# EAGLE board 00_CoverStage_Alt_v1 (EAGLE 9.6.2), part 1 of 5
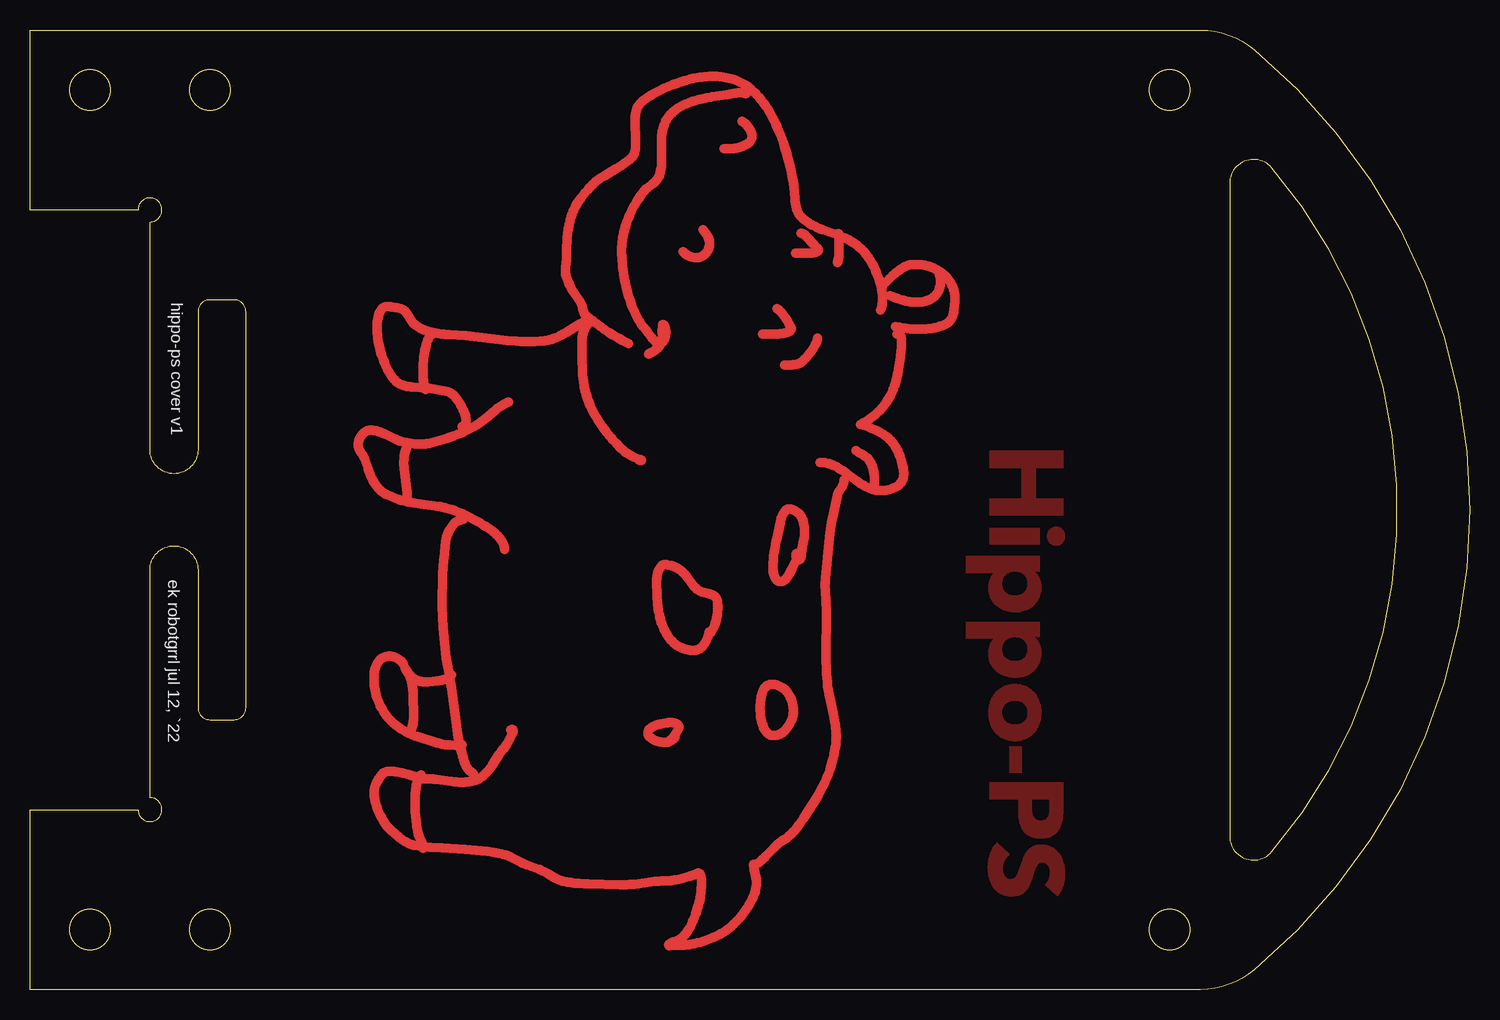
[diagram p0: board, top side]
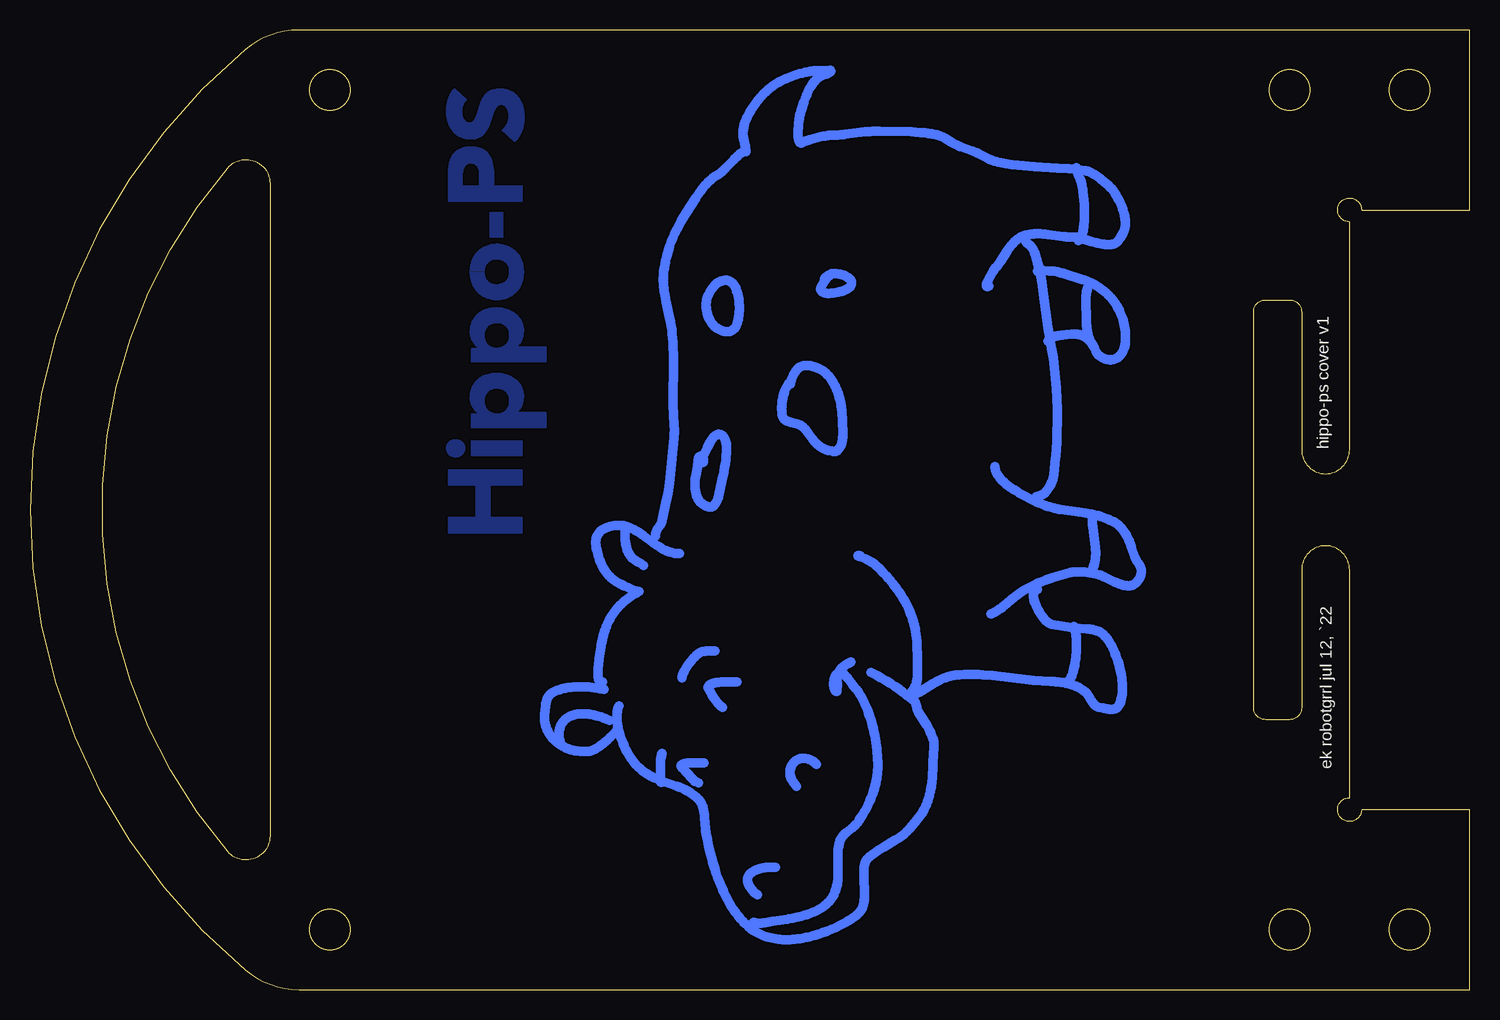
[diagram p1: board, bottom side, seen from below]

Size 120 x 80 mm. Coordinates in mm from the lower left corner, seen from the top.
Outline: 97.57,80 arc-40 102.06,78.37 arc-100 102.06,1.63 arc-40 97.57,0 0,0 0,15 9,15 arc270 10,16 10,35 arc-180 14,35 14,23.5 arc90 15,22.5 17,22.5 arc90 18,23.5 18,56.5 arc90 17,57.5 15,57.5 arc90 14,56.5 14,45 arc-180 10,45 10,64 arc270 9,65 0,65 0,80 97.57,80
Outline: 100,67.2 100,12.8 arc140 103.52,11.5 arc81 103.52,68.5 arc140 100,67.2
Outline: circle at 15,5 radius 1.7
Outline: circle at 15,75 radius 1.7
Outline: circle at 5,5 radius 1.7
Outline: circle at 5,75 radius 1.7
Outline: circle at 95,75 radius 1.7
Outline: circle at 95,5 radius 1.7
Copper layers (1*16): Top 0.035mm / dielectric 1.5mm / Bottom 0.035mm
Design rules "default *": minimum track width 8mil, minimum drill 0.35mm, track to track 10mil, track to pad 10mil, pad to pad 10mil, via to via 10mil, smd to smd 10mil, copper to edge 40mil, drill to drill 10mil, minimum pad ring 10mil, minimum via ring 8mil, stop-mask expansion 4mil, vias tented up to drill 0mil, thermal gap 10mil

## Placement (x,y rotation side)

## Tracks (layer width: path | path; a pad name or v marks a point on that pad's centre or on a via)
N$1
  Top 0.8: 68.94,42.39 67.98,43.1
N$2
  pour Top: 86.13,44.89 80.03,44.89 79.99,44.85 79.99,43.57 80.03,43.53 82.59,43.53 82.64,43.51 82.64,40.95 82.62,40.9 80.05,40.9 79.99,40.89 79.99,39.61 80,39.55 86.11,39.55 86.13,39.6 86.13,40.88 86.08,40.9 83.9,40.9 83.84,40.92 83.84,43.48 83.87,43.53 86.13,43.53 86.13,43.6
N$3
  pour Top: 85.52,38.55 85.45,38.55 85.37,38.53 85.3,38.51 85.23,38.49 85.16,38.45 85.1,38.41 85.04,38.37 84.99,38.31 84.94,38.26 84.89,38.2 84.86,38.13 84.83,38.06 84.8,37.99 84.79,37.92 84.78,37.84 84.78,37.77 84.79,37.69 84.8,37.62 84.82,37.55 84.85,37.48 84.88,37.41 84.93,37.35 84.97,37.29 85.03,37.24 85.08,37.19 85.15,37.15 85.21,37.11 85.28,37.08 85.35,37.06 85.43,37.05 85.5,37.04 85.58,37.04 85.65,37.05 85.73,37.06 85.8,37.09 85.87,37.12 85.93,37.15 85.99,37.2 86.05,37.25 86.1,37.3 86.15,37.36 86.19,37.42 86.23,37.49 86.25,37.56 86.27,37.63 86.28,37.7 86.29,37.78 86.29,37.85 86.28,37.93 86.26,38 86.24,38.07 86.21,38.14 86.17,38.21 86.12,38.27 86.07,38.32 86.02,38.37 85.96,38.42 85.9,38.46 85.83,38.49 85.76,38.52 85.68,38.54 85.61,38.55 85.53,38.55
N$4
  pour Top: 84.21,37.14 84.21,38.42 84.15,38.45 80.02,38.45 79.99,38.4 79.99,37.2 80.01,37.14
N$5
  pour Top: 216 corners
N$6
  pour Top: 216 corners
N$7
  pour Top: 228 corners
N$8
  pour Top: 81.63,20.22 81.63,18.1 81.69,18.08 82.67,18.08 82.67,20.2 82.61,20.22
N$9
  pour Top: 86.13,17.24 80.04,17.24 79.99,17.22 79.99,15.94 80.01,15.89 82.34,15.89 82.37,15.86 83.54,15.89 84.92,15.89 84.99,15.88 84.99,15.13 84.98,14.98 84.97,14.91 84.96,14.76 84.95,14.68 84.93,14.61 84.91,14.54 84.89,14.47 84.86,14.4 84.82,14.33 84.78,14.27 84.73,14.21 84.67,14.16 84.61,14.12 84.54,14.08 84.47,14.06 84.4,14.04 84.32,14.03 84.25,14.03 84.17,14.04 84.1,14.05 84.03,14.06 83.96,14.09 83.89,14.12 83.83,14.17 83.77,14.22 83.72,14.27 83.68,14.33 83.64,14.4 83.61,14.47 83.59,14.54 83.57,14.61 83.55,14.69 83.54,14.76 83.54,14.84 83.53,14.91 83.53,15.88 82.38,15.84 82.39,14.65 82.41,14.43 82.44,14.2 82.48,13.98 82.5,13.91 82.52,13.84 82.54,13.77 82.56,13.69 82.59,13.62 82.62,13.56 82.66,13.49 82.69,13.42 82.73,13.36 82.77,13.29 82.82,13.23 82.86,13.18 82.91,13.12 82.97,13.07 83.02,13.02 83.08,12.97 83.14,12.93 83.21,12.89 83.27,12.85 83.34,12.81 83.41,12.78 83.48,12.75 83.55,12.73 83.62,12.71 83.69,12.69 83.76,12.67 83.84,12.66 83.91,12.65 83.99,12.64 84.14,12.63 84.29,12.63 84.44,12.63 84.51,12.64 84.59,12.64 84.66,12.65 84.74,12.67 84.88,12.7 84.96,12.72 85.03,12.75 85.1,12.78 85.16,12.81 85.23,12.84 85.29,12.88 85.36,12.92 85.42,12.97 85.48,13.01 85.53,13.06 85.59,13.12 85.64,13.17 85.69,13.23 85.73,13.29 85.77,13.35 85.81,13.42 85.85,13.48 85.88,13.55 85.91,13.62 85.94,13.69 85.97,13.76 85.99,13.83 86.03,13.98 86.05,14.05 86.08,14.27 86.11,14.5 86.13,14.72 86.13,17.2
N$10
  pour Top: 262 corners
N$11
  Top 0.8: 72.16,55.28 72.44,55.22
N$12
  Top 0.8: 72.44,55.22 72.57,55.19
N$13
  Top 0.8: 72.57,55.19 72.78,55.15
N$14
  Top 0.8: 72.78,55.15 72.92,55.13
N$15
  Top 0.8: 72.92,55.13 73.13,55.11
N$16
  Top 0.8: 73.13,55.11 73.2,55.1
N$17
  Top 0.8: 73.2,55.1 73.41,55.08
N$18
  Top 0.8: 73.41,55.08 73.69,55.06
N$19
  Top 0.8: 73.69,55.06 73.97,55.06
N$20
  Top 0.8: 73.97,55.06 74.18,55.05
N$21
  Top 0.8: 74.18,55.05 74.32,55.05
N$22
  Top 0.8: 74.32,55.05 74.53,55.06
N$23
  Top 0.8: 74.53,55.06 74.67,55.07
N$24
  Top 0.8: 74.67,55.07 74.88,55.09
N$25
  Top 0.8: 74.88,55.09 75.02,55.1
N$26
  Top 0.8: 75.02,55.1 75.16,55.12
N$27
  Top 0.8: 75.16,55.12 75.3,55.15
N$28
  Top 0.8: 75.3,55.15 75.44,55.17
N$29
  Top 0.8: 75.44,55.17 75.57,55.2
N$30
  Top 0.8: 75.57,55.2 75.71,55.24
N$31
  Top 0.8: 75.71,55.24 75.78,55.26
N$32
  Top 0.8: 75.78,55.26 75.91,55.3
N$33
  Top 0.8: 75.91,55.3 76.04,55.35
N$34
  Top 0.8: 76.04,55.35 76.11,55.37
N$35
  Top 0.8: 76.11,55.37 76.17,55.4
N$36
  Top 0.8: 76.17,55.4 76.3,55.46
N$37
  Top 0.8: 76.3,55.46 76.36,55.5
N$38
  Top 0.8: 76.36,55.5 76.42,55.53
N$39
  Top 0.8: 76.42,55.53 76.48,55.57
N$40
  Top 0.8: 76.48,55.57 76.53,55.61
N$41
  Top 0.8: 76.53,55.61 76.59,55.66
N$42
  Top 0.8: 76.59,55.66 76.64,55.7
N$43
  Top 0.8: 76.64,55.7 76.69,55.75
N$44
  Top 0.8: 76.69,55.75 76.74,55.8
N$45
  Top 0.8: 76.74,55.8 76.78,55.86
N$46
  Top 0.8: 76.78,55.86 76.82,55.92
N$47
  Top 0.8: 76.82,55.92 76.85,55.98
N$48
  Top 0.8: 76.85,55.98 76.88,56.04
N$49
  Top 0.8: 76.88,56.04 76.91,56.11
N$50
  Top 0.8: 76.91,56.11 76.93,56.17
N$51
  Top 0.8: 76.93,56.17 76.95,56.24
N$52
  Top 0.8: 76.95,56.24 76.99,56.38
N$53
  Top 0.8: 76.99,56.38 77.01,56.52
N$54
  Top 0.8: 77.01,56.52 77.02,56.59
N$55
  Top 0.8: 77.02,56.59 77.07,57.08
N$56
  Top 0.8: 77.07,57.08 77.1,57.35
N$57
  Top 0.8: 77.1,57.35 77.11,57.56
N$58
  Top 0.8: 77.11,57.56 77.11,57.7
N$59
  Top 0.8: 77.11,57.7 77.1,57.78
N$60
  Top 0.8: 77.1,57.78 77.09,57.91
N$61
  Top 0.8: 77.09,57.91 77.07,58.05
N$62
  Top 0.8: 77.07,58.05 77.06,58.12
N$63
  Top 0.8: 77.06,58.12 77.02,58.26
N$64
  Top 0.8: 77.02,58.26 76.98,58.39
N$65
  Top 0.8: 76.98,58.39 76.96,58.46
N$66
  Top 0.8: 76.96,58.46 76.91,58.59
N$67
  Top 0.8: 76.91,58.59 76.85,58.72
N$68
  Top 0.8: 76.85,58.72 76.79,58.84
N$69
  Top 0.8: 76.79,58.84 76.75,58.91
N$70
  Top 0.8: 76.75,58.91 76.68,59.02
N$71
  Top 0.8: 76.68,59.02 76.64,59.08
N$72
  Top 0.8: 76.64,59.08 76.56,59.2
N$73
  Top 0.8: 76.56,59.2 76.47,59.3
N$74
  Top 0.8: 76.47,59.3 76.38,59.41
N$75
  Top 0.8: 76.38,59.41 76.33,59.46
N$76
  Top 0.8: 76.33,59.46 76.23,59.56
N$77
  Top 0.8: 76.23,59.56 76.12,59.65
N$78
  Top 0.8: 76.12,59.65 76.01,59.74
N$79
  Top 0.8: 76.01,59.74 75.96,59.78
N$80
  Top 0.8: 75.96,59.78 75.84,59.86
N$81
  Top 0.8: 75.84,59.86 75.72,59.93
N$82
  Top 0.8: 75.72,59.93 75.66,59.97
N$83
  Top 0.8: 75.66,59.97 75.54,60.04
N$84
  Top 0.8: 75.54,60.04 75.41,60.1
N$85
  Top 0.8: 75.41,60.1 75.35,60.13
N$86
  Top 0.8: 75.35,60.13 75.22,60.19
N$87
  Top 0.8: 75.22,60.19 75.09,60.23
N$88
  Top 0.8: 75.09,60.23 75.02,60.26
N$89
  Top 0.8: 75.02,60.26 74.89,60.3
N$90
  Top 0.8: 74.89,60.3 74.69,60.35
N$91
  Top 0.8: 74.69,60.35 74.55,60.38
N$92
  Top 0.8: 74.55,60.38 74.34,60.42
N$93
  Top 0.8: 74.34,60.42 74.13,60.44
N$94
  Top 0.8: 74.13,60.44 73.99,60.45
N$95
  Top 0.8: 73.99,60.45 73.78,60.45
N$96
  Top 0.8: 73.78,60.45 73.64,60.45
N$97
  Top 0.8: 73.64,60.45 73.57,60.44
N$98
  Top 0.8: 73.57,60.44 73.43,60.43
N$99
  Top 0.8: 73.43,60.43 73.36,60.42
N$100
  Top 0.8: 73.36,60.42 73.29,60.41
N$101
  Top 0.8: 73.29,60.41 73.22,60.39
N$102
  Top 0.8: 73.22,60.39 73.16,60.37
N$103
  Top 0.8: 73.16,60.37 73.09,60.34
N$104
  Top 0.8: 73.09,60.34 73.03,60.32
N$105
  Top 0.8: 73.03,60.32 72.96,60.29
N$106
  Top 0.8: 72.96,60.29 72.9,60.26
N$107
  Top 0.8: 72.9,60.26 72.84,60.22
N$108
  Top 0.8: 72.84,60.22 72.72,60.15
N$109
  Top 0.8: 72.72,60.15 72.66,60.12
N$110
  Top 0.8: 72.66,60.12 72.54,60.04
N$111
  Top 0.8: 72.54,60.04 72.43,59.96
N$112
  Top 0.8: 72.43,59.96 72.31,59.87
N$113
  Top 0.8: 72.31,59.87 72.21,59.78
N$114
  Top 0.8: 72.21,59.78 72.04,59.65
N$115
  Top 0.8: 72.04,59.65 71.89,59.51
N$116
  Top 0.8: 71.89,59.51 71.63,59.27
N$117
  Top 0.8: 71.63,59.27 71.13,58.77
N$118
  Top 0.8: 75.82,59.51 75.85,59.45
N$119
  Top 0.8: 75.85,59.45 75.87,59.38
N$120
  Top 0.8: 75.87,59.38 75.89,59.31
N$121
  Top 0.8: 75.89,59.31 75.9,59.25
N$122
  Top 0.8: 75.9,59.25 75.91,59.17
N$123
  Top 0.8: 75.91,59.17 75.91,59.11
N$124
  Top 0.8: 75.91,59.11 75.92,59.03
N$125
  Top 0.8: 75.92,59.03 75.91,58.96
N$126
  Top 0.8: 75.91,58.96 75.91,58.89
N$127
  Top 0.8: 75.91,58.89 75.9,58.82
N$128
  Top 0.8: 75.9,58.82 75.88,58.68
N$129
  Top 0.8: 75.88,58.68 75.87,58.62
N$130
  Top 0.8: 75.87,58.62 75.83,58.48
N$131
  Top 0.8: 75.83,58.48 75.81,58.41
N$132
  Top 0.8: 75.81,58.41 75.78,58.35
N$133
  Top 0.8: 75.78,58.35 75.75,58.28
N$134
  Top 0.8: 75.75,58.28 75.69,58.16
N$135
  Top 0.8: 75.69,58.16 75.61,58.04
N$136
  Top 0.8: 75.61,58.04 75.53,57.93
N$137
  Top 0.8: 75.53,57.93 75.43,57.82
N$138
  Top 0.8: 75.43,57.82 75.38,57.77
N$139
  Top 0.8: 75.38,57.77 75.33,57.73
N$140
  Top 0.8: 75.33,57.73 75.27,57.68
N$141
  Top 0.8: 75.27,57.68 75.22,57.64
N$142
  Top 0.8: 75.22,57.64 75.16,57.6
N$143
  Top 0.8: 75.16,57.6 75.03,57.53
N$144
  Top 0.8: 75.03,57.53 74.91,57.47
N$145
  Top 0.8: 74.91,57.47 74.78,57.42
N$146
  Top 0.8: 74.78,57.42 74.64,57.38
N$147
  Top 0.8: 74.64,57.38 74.5,57.35
N$148
  Top 0.8: 74.5,57.35 74.36,57.33
N$149
  Top 0.8: 74.36,57.33 74.22,57.31
N$150
  Top 0.8: 74.22,57.31 74.08,57.3
N$151
  Top 0.8: 74.08,57.3 74.01,57.3
N$152
  Top 0.8: 74.01,57.3 73.94,57.3
N$153
  Top 0.8: 73.94,57.3 73.8,57.3
N$154
  Top 0.8: 73.8,57.3 73.66,57.31
N$155
  Top 0.8: 73.66,57.31 73.45,57.33
N$156
  Top 0.8: 73.45,57.33 73.31,57.35
N$157
  Top 0.8: 73.31,57.35 73.24,57.36
N$158
  Top 0.8: 73.24,57.36 73.03,57.4
N$159
  Top 0.8: 73.03,57.4 72.9,57.43
N$160
  Top 0.8: 72.9,57.43 72.76,57.46
N$161
  Top 0.8: 72.76,57.46 72.56,57.52
N$162
  Top 0.8: 72.56,57.52 72.36,57.59
N$163
  Top 0.8: 72.36,57.59 72.22,57.63
N$164
  Top 0.8: 72.22,57.63 72.09,57.68
N$165
  Top 0.8: 72.09,57.68 71.96,57.74
N$166
  Top 0.8: 71.96,57.74 71.9,57.77
N$167
  Top 0.8: 71.9,57.77 71.71,57.86
N$168
  Top 0.8: 70.91,56.65 70.94,56.72
N$169
  Top 0.8: 70.94,56.72 70.96,56.78
N$170
  Top 0.8: 70.96,56.78 70.98,56.85
N$171
  Top 0.8: 70.98,56.85 71,56.92
N$172
  Top 0.8: 71,56.92 71.02,56.98
N$173
  Top 0.8: 71.02,56.98 71.03,57.05
N$174
  Top 0.8: 71.03,57.05 71.06,57.19
N$175
  Top 0.8: 71.06,57.19 71.07,57.26
N$176
  Top 0.8: 71.07,57.26 71.08,57.4
N$177
  Top 0.8: 71.08,57.4 71.08,57.54
N$178
  Top 0.8: 71.08,57.54 71.08,57.68
N$179
  Top 0.8: 71.08,57.68 71.07,57.82
N$180
  Top 0.8: 71.07,57.82 71.06,57.96
N$181
  Top 0.8: 71.06,57.96 71.04,58.17
N$182
  Top 0.8: 71.04,58.17 71.02,58.31
N$183
  Top 0.8: 71.02,58.31 70.99,58.45
N$184
  Top 0.8: 70.99,58.45 70.96,58.59
N$185
  Top 0.8: 70.96,58.59 70.93,58.73
N$186
  Top 0.8: 70.93,58.73 70.91,58.79
N$187
  Top 0.8: 70.91,58.79 70.89,58.86
N$188
  Top 0.8: 70.89,58.86 70.85,59
N$189
  Top 0.8: 70.85,59 70.76,59.26
N$190
  Top 0.8: 70.76,59.26 70.66,59.53
N$191
  Top 0.8: 70.66,59.53 70.58,59.72
N$192
  Top 0.8: 70.58,59.72 70.47,59.98
N$193
  Top 0.8: 70.47,59.98 70.38,60.17
N$194
  Top 0.8: 70.38,60.17 70.32,60.3
N$195
  Top 0.8: 70.32,60.3 70.26,60.42
N$196
  Top 0.8: 70.26,60.42 70.16,60.61
N$197
  Top 0.8: 70.16,60.61 70.05,60.79
N$198
  Top 0.8: 70.05,60.79 69.97,60.91
N$199
  Top 0.8: 69.97,60.91 69.94,60.97
N$200
  Top 0.8: 69.94,60.97 69.86,61.08
N$201
  Top 0.8: 69.86,61.08 69.77,61.2
N$202
  Top 0.8: 69.77,61.2 69.69,61.31
N$203
  Top 0.8: 69.69,61.31 69.6,61.42
N$204
  Top 0.8: 69.6,61.42 69.55,61.47
N$205
  Top 0.8: 69.55,61.47 69.46,61.57
N$206
  Top 0.8: 69.46,61.57 69.31,61.72
N$207
  Top 0.8: 69.31,61.72 69.26,61.77
N$208
  Top 0.8: 69.26,61.77 69.16,61.87
N$209
  Top 0.8: 69.16,61.87 69.1,61.92
N$210
  Top 0.8: 69.1,61.92 69,62.01
N$211
  Top 0.8: 69,62.01 68.89,62.09
N$212
  Top 0.8: 68.89,62.09 68.83,62.13
N$213
  Top 0.8: 68.83,62.13 68.77,62.17
N$214
  Top 0.8: 68.77,62.17 68.66,62.25
N$215
  Top 0.8: 68.66,62.25 68.54,62.33
N$216
  Top 0.8: 68.54,62.33 68.48,62.37
N$217
  Top 0.8: 68.48,62.37 68.42,62.4
N$218
  Top 0.8: 68.42,62.4 68.29,62.47
N$219
  Top 0.8: 68.29,62.47 68.17,62.54
N$220
  Top 0.8: 68.17,62.54 68.04,62.6
N$221
  Top 0.8: 68.04,62.6 67.92,62.66
N$222
  Top 0.8: 67.92,62.66 67.72,62.74
N$223
  Top 0.8: 67.72,62.74 67.53,62.82
N$224
  Top 0.8: 67.53,62.82 67.46,62.85
N$225
  Top 0.8: 67.46,62.85 66.07,63.35
N$226
  Top 0.8: 66.07,63.35 65.81,63.45
N$227
  Top 0.8: 65.81,63.45 65.62,63.54
N$228
  Top 0.8: 65.62,63.54 65.43,63.63
N$229
  Top 0.8: 65.43,63.63 65.24,63.72
N$230
  Top 0.8: 65.24,63.72 65.12,63.79
N$231
  Top 0.8: 65.12,63.79 65,63.86
N$232
  Top 0.8: 65,63.86 64.88,63.94
N$233
  Top 0.8: 64.88,63.94 64.76,64.02
N$234
  Top 0.8: 64.76,64.02 64.65,64.1
N$235
  Top 0.8: 64.65,64.1 64.59,64.15
N$236
  Top 0.8: 64.59,64.15 64.49,64.23
N$237
  Top 0.8: 64.49,64.23 64.38,64.33
N$238
  Top 0.8: 64.38,64.33 64.28,64.42
N$239
  Top 0.8: 64.28,64.42 64.23,64.48
N$240
  Top 0.8: 64.23,64.48 64.19,64.53
N$241
  Top 0.8: 64.19,64.53 64.14,64.59
N$242
  Top 0.8: 64.14,64.59 64.1,64.64
N$243
  Top 0.8: 64.1,64.64 64.07,64.7
N$244
  Top 0.8: 64.07,64.7 64.04,64.77
N$245
  Top 0.8: 64.04,64.77 64.01,64.83
N$246
  Top 0.8: 64.01,64.83 63.98,64.9
N$247
  Top 0.8: 63.98,64.9 63.95,64.96
N$248
  Top 0.8: 63.95,64.96 63.91,65.09
N$249
  Top 0.8: 63.91,65.09 63.89,65.16
N$250
  Top 0.8: 63.89,65.16 63.86,65.3
N$251
  Top 0.8: 63.86,65.3 63.84,65.37
N$252
  Top 0.8: 63.84,65.37 63.82,65.51
N$253
  Top 0.8: 63.82,65.51 63.8,65.57
N$254
  Top 0.8: 63.8,65.57 63.79,65.71
N$255
  Top 0.8: 63.79,65.71 63.76,65.92
N$256
  Top 0.8: 63.76,65.92 63.75,65.99
N$257
  Top 0.8: 63.75,65.99 63.68,66.9
N$258
  Top 0.8: 63.68,66.9 63.67,67.04
N$259
  Top 0.8: 63.67,67.04 63.65,67.18
N$260
  Top 0.8: 63.65,67.18 63.64,67.25
N$261
  Top 0.8: 63.64,67.25 63.54,67.81
N$262
  Top 0.8: 63.54,67.81 63.42,68.36
N$263
  Top 0.8: 63.42,68.36 63.28,68.97
N$264
  Top 0.8: 63.28,68.97 63.11,69.58
N$265
  Top 0.8: 63.11,69.58 63.1,69.65
N$266
  Top 0.8: 63.1,69.65 62.91,70.26
N$267
  Top 0.8: 62.91,70.26 62.8,70.59
N$268
  Top 0.8: 62.8,70.59 62.68,70.92
N$269
  Top 0.8: 62.68,70.92 62.56,71.25
N$270
  Top 0.8: 62.56,71.25 62.46,71.51
N$271
  Top 0.8: 62.46,71.51 62.29,71.9
N$272
  Top 0.8: 62.29,71.9 62.17,72.16
N$273
  Top 0.8: 62.17,72.16 62.02,72.47
N$274
  Top 0.8: 62.02,72.47 61.86,72.78
N$275
  Top 0.8: 61.86,72.78 61.72,73.03
N$276
  Top 0.8: 61.72,73.03 61.69,73.09
N$277
  Top 0.8: 61.69,73.09 61.51,73.39
N$278
  Top 0.8: 61.51,73.39 61.35,73.63
N$279
  Top 0.8: 61.35,73.63 61.19,73.86
N$280
  Top 0.8: 61.19,73.86 61.15,73.92
N$281
  Top 0.8: 61.15,73.92 60.98,74.14
N$282
  Top 0.8: 60.98,74.14 60.94,74.2
N$283
  Top 0.8: 60.94,74.2 60.76,74.41
N$284
  Top 0.8: 60.76,74.41 60.57,74.62
N$285
  Top 0.8: 60.57,74.62 60.52,74.67
N$286
  Top 0.8: 60.52,74.67 60.32,74.87
N$287
  Top 0.8: 60.32,74.87 60.11,75.05
N$288
  Top 0.8: 60.11,75.05 59.89,75.23
N$289
  Top 0.8: 59.89,75.23 59.83,75.27
N$290
  Top 0.8: 59.83,75.27 59.66,75.39
N$291
  Top 0.8: 59.66,75.39 59.6,75.43
N$292
  Top 0.8: 59.6,75.43 59.36,75.57
N$293
  Top 0.8: 59.36,75.57 59.11,75.7
N$294
  Top 0.8: 59.11,75.7 58.85,75.81
N$295
  Top 0.8: 58.85,75.81 58.65,75.88
N$296
  Top 0.8: 58.65,75.88 58.59,75.9
N$297
  Top 0.8: 58.59,75.9 58.45,75.94
N$298
  Top 0.8: 58.45,75.94 58.25,75.99
N$299
  Top 0.8: 58.25,75.99 58.04,76.04
N$300
  Top 0.8: 58.04,76.04 57.83,76.07
N$301
  Top 0.8: 57.83,76.07 57.62,76.1
N$302
  Top 0.8: 57.62,76.1 57.48,76.11
N$303
  Top 0.8: 57.48,76.11 57.27,76.13
N$304
  Top 0.8: 57.27,76.13 57.2,76.13
N$305
  Top 0.8: 57.2,76.13 56.99,76.14
N$306
  Top 0.8: 56.99,76.14 56.78,76.13
N$307
  Top 0.8: 56.78,76.13 56.64,76.13
N$308
  Top 0.8: 56.64,76.13 56.43,76.12
N$309
  Top 0.8: 56.43,76.12 56.22,76.1
N$310
  Top 0.8: 56.22,76.1 56.01,76.08
N$311
  Top 0.8: 56.01,76.08 55.8,76.05
N$312
  Top 0.8: 55.8,76.05 55.59,76.01
N$313
  Top 0.8: 55.59,76.01 55.32,75.96
N$314
  Top 0.8: 55.32,75.96 55.18,75.93
N$315
  Top 0.8: 55.18,75.93 54.97,75.88
N$316
  Top 0.8: 54.97,75.88 54.77,75.83
N$317
  Top 0.8: 54.77,75.83 54.57,75.77
N$318
  Top 0.8: 54.57,75.77 54.3,75.69
N$319
  Top 0.8: 54.3,75.69 54.16,75.65
N$320
  Top 0.8: 54.16,75.65 53.96,75.58
N$321
  Top 0.8: 53.96,75.58 53.57,75.44
N$322
  Top 0.8: 53.57,75.44 53.18,75.28
N$323
  Top 0.8: 53.18,75.28 52.86,75.13
N$324
  Top 0.8: 52.86,75.13 52.48,74.95
N$325
  Top 0.8: 52.48,74.95 52.23,74.82
N$326
  Top 0.8: 52.23,74.82 51.98,74.69
N$327
  Top 0.8: 51.98,74.69 51.8,74.58
N$328
  Top 0.8: 51.8,74.58 51.68,74.51
N$329
  Top 0.8: 51.68,74.51 51.56,74.43
N$330
  Top 0.8: 51.56,74.43 51.38,74.31
N$331
  Top 0.8: 51.38,74.31 51.27,74.23
N$332
  Top 0.8: 51.27,74.23 51.16,74.14
N$333
  Top 0.8: 51.16,74.14 51.05,74.05
N$334
  Top 0.8: 51.05,74.05 51,74
N$335
  Top 0.8: 51,74 50.9,73.9
N$336
  Top 0.8: 50.9,73.9 50.86,73.85
N$337
  Top 0.8: 50.86,73.85 50.81,73.8
N$338
  Top 0.8: 50.81,73.8 50.77,73.74
N$339
  Top 0.8: 50.77,73.74 50.72,73.69
N$340
  Top 0.8: 50.72,73.69 50.69,73.63
N$341
  Top 0.8: 50.69,73.63 50.65,73.57
N$342
  Top 0.8: 50.65,73.57 50.62,73.51
N$343
  Top 0.8: 50.62,73.51 50.59,73.44
N$344
  Top 0.8: 50.59,73.44 50.57,73.38
N$345
  Top 0.8: 50.57,73.38 50.54,73.31
N$346
  Top 0.8: 50.54,73.31 50.53,73.24
N$347
  Top 0.8: 50.53,73.24 50.51,73.17
N$348
  Top 0.8: 50.51,73.17 50.48,73.03
N$349
  Top 0.8: 50.48,73.03 50.47,72.89
N$350
  Top 0.8: 50.47,72.89 50.46,72.75
N$351
  Top 0.8: 50.46,72.75 50.45,72.68
N$352
  Top 0.8: 50.45,72.68 50.44,72.47
N$353
  Top 0.8: 50.44,72.47 50.44,72.26
N$354
  Top 0.8: 50.44,72.26 50.44,72.19
N$355
  Top 0.8: 50.44,72.19 50.49,71
N$356
  Top 0.8: 50.49,71 50.49,70.72
N$357
  Top 0.8: 50.49,70.72 50.49,70.58
N$358
  Top 0.8: 50.49,70.58 50.49,70.44
N$359
  Top 0.8: 50.49,70.44 50.48,70.3
N$360
  Top 0.8: 50.48,70.3 50.47,70.16
N$361
  Top 0.8: 50.47,70.16 50.46,70.09
N$362
  Top 0.8: 50.46,70.09 50.44,69.95
N$363
  Top 0.8: 50.44,69.95 50.43,69.88
N$364
  Top 0.8: 50.43,69.88 50.41,69.81
N$365
  Top 0.8: 50.41,69.81 50.39,69.74
N$366
  Top 0.8: 50.39,69.74 50.36,69.68
N$367
  Top 0.8: 50.36,69.68 50.34,69.61
N$368
  Top 0.8: 50.34,69.61 50.31,69.55
N$369
  Top 0.8: 50.31,69.55 50.27,69.49
N$370
  Top 0.8: 50.27,69.49 50.22,69.44
N$371
  Top 0.8: 50.22,69.44 50.18,69.38
N$372
  Top 0.8: 50.18,69.38 50.07,69.29
N$373
  Top 0.8: 50.07,69.29 49.97,69.19
N$374
  Top 0.8: 49.97,69.19 49.86,69.1
N$375
  Top 0.8: 49.86,69.1 49.69,68.97
N$376
  Top 0.8: 49.69,68.97 49.58,68.89
N$377
  Top 0.8: 49.58,68.89 49.41,68.77
N$378
  Top 0.8: 49.41,68.77 49.23,68.65
N$379
  Top 0.8: 49.23,68.65 48.87,68.43
N$380
  Top 0.8: 48.87,68.43 47.84,67.83
N$381
  Top 0.8: 47.84,67.83 47.6,67.68
N$382
  Top 0.8: 47.6,67.68 47.49,67.6
N$383
  Top 0.8: 47.49,67.6 47.43,67.56
N$384
  Top 0.8: 47.43,67.56 47.32,67.48
N$385
  Top 0.8: 47.32,67.48 47.21,67.39
N$386
  Top 0.8: 47.21,67.39 47.1,67.3
N$387
  Top 0.8: 47.1,67.3 46.94,67.16
N$388
  Top 0.8: 46.94,67.16 46.84,67.06
N$389
  Top 0.8: 46.84,67.06 46.74,66.96
N$390
  Top 0.8: 46.74,66.96 46.65,66.85
N$391
  Top 0.8: 46.65,66.85 46.46,66.65
N$392
  Top 0.8: 46.46,66.65 46.23,66.38
N$393
  Top 0.8: 46.23,66.38 45.92,65.99
N$394
  Top 0.8: 45.92,65.99 45.84,65.88
N$395
  Top 0.8: 45.84,65.88 45.8,65.83
N$396
  Top 0.8: 45.8,65.83 45.72,65.71
N$397
  Top 0.8: 45.72,65.71 45.64,65.59
N$398
  Top 0.8: 45.64,65.59 45.53,65.41
N$399
  Top 0.8: 45.53,65.41 45.47,65.29
N$400
  Top 0.8: 45.47,65.29 45.4,65.16
N$401
  Top 0.8: 45.4,65.16 45.31,64.97
N$402
  Top 0.8: 45.31,64.97 45.26,64.84
N$403
  Top 0.8: 45.26,64.84 45.19,64.64
N$404
  Top 0.8: 45.19,64.64 45.14,64.51
N$405
  Top 0.8: 45.14,64.51 45.1,64.38
N$406
  Top 0.8: 45.1,64.38 45.04,64.17
N$407
  Top 0.8: 45.04,64.17 45,64.04
N$408
  Top 0.8: 45,64.04 44.96,63.83
N$409
  Top 0.8: 44.96,63.83 44.93,63.69
N$410
  Top 0.8: 44.93,63.69 44.89,63.49
N$411
  Top 0.8: 44.89,63.49 44.87,63.35
N$412
  Top 0.8: 44.87,63.35 44.82,63
N$413
  Top 0.8: 44.82,63 44.78,62.65
N$414
  Top 0.8: 44.78,62.65 44.75,62.3
N$415
  Top 0.8: 44.75,62.3 44.73,61.95
N$416
  Top 0.8: 44.73,61.95 44.71,61.32
N$417
  Top 0.8: 44.71,61.32 44.71,60.76
N$418
  Top 0.8: 44.71,60.76 44.7,60.62
N$419
  Top 0.8: 44.7,60.62 44.65,60.2
N$420
  Top 0.8: 44.65,60.2 44.63,60.06
N$421
  Top 0.8: 44.63,60.06 44.63,59.99
N$422
  Top 0.8: 44.63,59.99 44.63,59.92
N$423
  Top 0.8: 44.63,59.92 44.63,59.85
N$424
  Top 0.8: 44.63,59.85 44.64,59.78
N$425
  Top 0.8: 44.64,59.78 44.65,59.71
N$426
  Top 0.8: 44.65,59.71 44.66,59.64
N$427
  Top 0.8: 44.66,59.64 44.7,59.5
N$428
  Top 0.8: 44.7,59.5 44.73,59.37
N$429
  Top 0.8: 44.73,59.37 44.75,59.3
N$430
  Top 0.8: 44.75,59.3 44.8,59.17
N$431
  Top 0.8: 44.8,59.17 44.88,58.97
N$432
  Top 0.8: 44.88,58.97 44.94,58.84
N$433
  Top 0.8: 44.94,58.84 45,58.72
N$434
  Top 0.8: 45,58.72 45.06,58.59
N$435
  Top 0.8: 45.06,58.59 45.17,58.41
N$436
  Top 0.8: 45.17,58.41 45.24,58.28
N$437
  Top 0.8: 45.24,58.28 45.84,57.33
N$438
  Top 0.8: 45.84,57.33 45.98,57.09
N$439
  Top 0.8: 45.98,57.09 46.01,57.03
N$440
  Top 0.8: 46.01,57.03 46.03,56.96
N$441
  Top 0.8: 46.03,56.96 46.05,56.89
N$442
  Top 0.8: 46.05,56.89 46.07,56.83
N$443
  Top 0.8: 46.07,56.83 46.11,56.62
N$444
  Top 0.8: 46.11,56.62 46.12,56.55
N$445
  Top 0.8: 46.12,56.55 46.15,56.48
N$446
  Top 0.8: 46.15,56.48 46.17,56.42
N$447
  Top 0.8: 46.17,56.42 46.2,56.36
N$448
  Top 0.8: 46.2,56.36 46.24,56.3
N$449
  Top 0.8: 46.24,56.3 46.29,56.24
N$450
  Top 0.8: 46.29,56.24 46.33,56.19
N$451
  Top 0.8: 46.33,56.19 46.38,56.14
N$452
  Top 0.8: 46.38,56.14 46.44,56.09
N$453
  Top 0.8: 46.44,56.09 46.49,56.05
N$454
  Top 0.8: 46.49,56.05 46.55,56.01
N$455
  Top 0.8: 46.55,56.01 46.84,55.81
N$456
  Top 0.8: 46.84,55.81 46.9,55.77
N$457
  Top 0.8: 46.9,55.77 47.23,55.51
N$458
  Top 0.8: 47.23,55.51 47.56,55.25
N$459
  Top 0.8: 47.56,55.25 47.91,55.01
N$460
  Top 0.8: 47.91,55.01 48.26,54.78
N$461
  Top 0.8: 48.26,54.78 48.62,54.55
N$462
  Top 0.8: 48.62,54.55 49.04,54.31
N$463
  Top 0.8: 49.04,54.31 49.41,54.11
N$464
  Top 0.8: 49.41,54.11 49.91,53.85
N$465
  Top 0.8: 59.7,74.67 59.63,74.7
N$466
  Top 0.8: 59.63,74.7 59.56,74.72
N$467
  Top 0.8: 59.56,74.72 59.5,74.74
N$468
  Top 0.8: 59.5,74.74 59.43,74.75
N$469
  Top 0.8: 59.43,74.75 59.36,74.76
N$470
  Top 0.8: 59.36,74.76 59.29,74.77
N$471
  Top 0.8: 59.29,74.77 59.22,74.77
N$472
  Top 0.8: 59.22,74.77 59.15,74.77
N$473
  Top 0.8: 59.15,74.77 59.08,74.77
N$474
  Top 0.8: 59.08,74.77 59.01,74.76
N$475
  Top 0.8: 59.01,74.76 58.87,74.75
N$476
  Top 0.8: 58.87,74.75 58.73,74.73
N$477
  Top 0.8: 58.73,74.73 58.1,74.62
N$478
  Top 0.8: 58.1,74.62 56.85,74.43
N$479
  Top 0.8: 56.85,74.43 56.78,74.42
N$480
  Top 0.8: 56.78,74.42 56.44,74.35
N$481
  Top 0.8: 56.44,74.35 56.09,74.28
N$482
  Top 0.8: 56.09,74.28 55.89,74.23
N$483
  Top 0.8: 55.89,74.23 55.68,74.18
N$484
  Top 0.8: 55.68,74.18 55.48,74.12
N$485
  Top 0.8: 55.48,74.12 55.28,74.06
N$486
  Top 0.8: 55.28,74.06 55.15,74.02
N$487
  Top 0.8: 55.15,74.02 54.95,73.95
N$488
  Top 0.8: 54.95,73.95 54.75,73.87
N$489
  Top 0.8: 54.75,73.87 54.62,73.81
N$490
  Top 0.8: 54.62,73.81 54.43,73.72
N$491
  Top 0.8: 54.43,73.72 54.37,73.69
N$492
  Top 0.8: 54.37,73.69 54.24,73.62
N$493
  Top 0.8: 54.24,73.62 54.06,73.51
N$494
  Top 0.8: 54.06,73.51 53.95,73.43
N$495
  Top 0.8: 53.95,73.43 53.78,73.31
N$496
  Top 0.8: 53.78,73.31 53.67,73.22
N$497
  Top 0.8: 53.67,73.22 53.62,73.17
N$498
  Top 0.8: 53.62,73.17 53.51,73.08
N$499
  Top 0.8: 53.51,73.08 53.41,72.98
N$500
  Top 0.8: 53.41,72.98 53.37,72.93
N$501
  Top 0.8: 53.37,72.93 53.28,72.82
N$502
  Top 0.8: 53.28,72.82 53.23,72.76
N$503
  Top 0.8: 53.23,72.76 53.15,72.65
N$504
  Top 0.8: 53.15,72.65 53.08,72.53
N$505
  Top 0.8: 53.08,72.53 53.04,72.47
N$506
  Top 0.8: 53.04,72.47 52.97,72.34
N$507
  Top 0.8: 52.97,72.34 52.89,72.15
N$508
  Top 0.8: 52.89,72.15 52.84,72.02
N$509
  Top 0.8: 52.84,72.02 52.8,71.89
N$510
  Top 0.8: 52.8,71.89 52.78,71.82
N$511
  Top 0.8: 52.78,71.82 52.76,71.75
N$512
  Top 0.8: 52.76,71.75 52.73,71.61
N$513
  Top 0.8: 52.73,71.61 52.7,71.48
N$514
  Top 0.8: 52.7,71.48 52.68,71.34
N$515
  Top 0.8: 52.68,71.34 52.67,71.2
N$516
  Top 0.8: 52.67,71.2 52.65,71.06
N$517
  Top 0.8: 52.65,71.06 52.65,70.99
N$518
  Top 0.8: 52.65,70.99 52.64,70.78
N$519
  Top 0.8: 52.64,70.78 52.64,70.49
N$520
  Top 0.8: 52.64,70.49 52.66,69.37
N$521
  Top 0.8: 52.66,69.37 52.66,69.09
N$522
  Top 0.8: 52.66,69.09 52.65,68.95
N$523
  Top 0.8: 52.65,68.95 52.65,68.81
N$524
  Top 0.8: 52.65,68.81 52.64,68.74
N$525
  Top 0.8: 52.64,68.74 52.62,68.6
N$526
  Top 0.8: 52.62,68.6 52.61,68.46
N$527
  Top 0.8: 52.61,68.46 52.58,68.32
N$528
  Top 0.8: 52.58,68.32 52.55,68.18
N$529
  Top 0.8: 52.55,68.18 52.51,68.05
N$530
  Top 0.8: 52.51,68.05 52.47,67.91
N$531
  Top 0.8: 52.47,67.91 52.42,67.78
N$532
  Top 0.8: 52.42,67.78 52.39,67.72
N$533
  Top 0.8: 52.39,67.72 52.36,67.66
N$534
  Top 0.8: 52.36,67.66 52.32,67.6
N$535
  Top 0.8: 52.32,67.6 52.28,67.54
N$536
  Top 0.8: 52.28,67.54 52.23,67.48
N$537
  Top 0.8: 52.23,67.48 52.19,67.43
N$538
  Top 0.8: 52.19,67.43 52.14,67.38
N$539
  Top 0.8: 52.14,67.38 52.09,67.33
N$540
  Top 0.8: 52.09,67.33 52.04,67.28
N$541
  Top 0.8: 52.04,67.28 51.93,67.19
N$542
  Top 0.8: 51.93,67.19 51.43,66.8
N$543
  Top 0.8: 51.43,66.8 51.33,66.71
N$544
  Top 0.8: 51.33,66.71 51.27,66.66
N$545
  Top 0.8: 51.27,66.66 51.22,66.61
N$546
  Top 0.8: 51.22,66.61 51.18,66.56
N$547
  Top 0.8: 51.18,66.56 51.13,66.51
N$548
  Top 0.8: 51.13,66.51 51,66.34
N$549
  Top 0.8: 51,66.34 50.88,66.17
N$550
  Top 0.8: 50.88,66.17 50.76,66
N$551
  Top 0.8: 50.76,66 50.6,65.76
N$552
  Top 0.8: 50.6,65.76 50.46,65.52
N$553
  Top 0.8: 50.46,65.52 50.32,65.27
N$554
  Top 0.8: 50.32,65.27 50.2,65.02
N$555
  Top 0.8: 50.2,65.02 50.1,64.83
N$556
  Top 0.8: 50.1,64.83 49.99,64.58
N$557
  Top 0.8: 49.99,64.58 49.88,64.32
N$558
  Top 0.8: 49.88,64.32 49.78,64.05
N$559
  Top 0.8: 49.78,64.05 49.69,63.79
N$560
  Top 0.8: 49.69,63.79 49.6,63.52
N$561
  Top 0.8: 49.6,63.52 49.54,63.32
N$562
  Top 0.8: 49.54,63.32 49.48,63.04
N$563
  Top 0.8: 49.48,63.04 49.46,62.98
N$564
  Top 0.8: 49.46,62.98 49.42,62.77
N$565
  Top 0.8: 49.42,62.77 49.4,62.63
N$566
  Top 0.8: 49.4,62.63 49.38,62.49
N$567
  Top 0.8: 49.38,62.49 49.35,62.28
N$568
  Top 0.8: 49.35,62.28 49.34,62.07
N$569
  Top 0.8: 49.34,62.07 49.33,61.86
N$570
  Top 0.8: 49.33,61.86 49.32,61.79
N$571
  Top 0.8: 49.32,61.79 49.32,61.51
N$572
  Top 0.8: 49.32,61.51 49.33,61.3
N$573
  Top 0.8: 49.33,61.3 49.34,61.09
N$574
  Top 0.8: 49.34,61.09 49.35,60.81
N$575
  Top 0.8: 49.35,60.81 49.38,60.53
N$576
  Top 0.8: 49.38,60.53 49.41,60.25
N$577
  Top 0.8: 49.41,60.25 49.43,60.04
N$578
  Top 0.8: 49.43,60.04 49.48,59.69
N$579
  Top 0.8: 49.48,59.69 49.53,59.41
N$580
  Top 0.8: 49.53,59.41 49.58,59.14
N$581
  Top 0.8: 49.58,59.14 49.64,58.86
N$582
  Top 0.8: 49.64,58.86 49.7,58.59
N$583
  Top 0.8: 49.7,58.59 49.77,58.31
N$584
  Top 0.8: 49.77,58.31 49.82,58.11
N$585
  Top 0.8: 49.82,58.11 49.92,57.77
N$586
  Top 0.8: 49.92,57.77 50,57.5
N$587
  Top 0.8: 50,57.5 50.09,57.23
N$588
  Top 0.8: 50.09,57.23 50.16,57.04
N$589
  Top 0.8: 50.16,57.04 50.27,56.78
N$590
  Top 0.8: 50.27,56.78 50.38,56.52
N$591
  Top 0.8: 50.38,56.52 50.46,56.32
N$592
  Top 0.8: 50.46,56.32 50.59,56.07
N$593
  Top 0.8: 50.59,56.07 50.69,55.89
N$594
  Top 0.8: 50.69,55.89 50.84,55.65
N$595
  Top 0.8: 50.84,55.65 50.95,55.47
N$596
  Top 0.8: 50.95,55.47 51.08,55.3
N$597
  Top 0.8: 51.08,55.3 51.21,55.14
N$598
  Top 0.8: 51.21,55.14 51.36,54.98
N$599
  Top 0.8: 51.36,54.98 51.4,54.93
N$600
  Top 0.8: 51.4,54.93 51.49,54.82
N$601
  Top 0.8: 51.49,54.82 51.82,54.37
N$602
  Top 0.8: 51.82,54.37 51.91,54.26
N$603
  Top 0.8: 51.91,54.26 52,54.15
N$604
  Top 0.8: 52,54.15 52.05,54.1
N$605
  Top 0.8: 52.05,54.1 52.1,54.05
N$606
  Top 0.8: 52.1,54.05 52.15,54
N$607
  Top 0.8: 52.15,54 52.21,53.96
N$608
  Top 0.8: 52.21,53.96 52.26,53.92
N$609
  Top 0.8: 52.26,53.92 52.32,53.88
N$610
  Top 0.8: 52.32,53.88 52.39,53.86
N$611
  Top 0.8: 52.39,53.86 52.46,53.85
N$612
  Top 0.8: 52.46,53.85 52.53,53.86
N$613
  Top 0.8: 52.53,53.86 52.6,53.89
N$614
  Top 0.8: 52.6,53.89 52.66,53.92
N$615
  Top 0.8: 52.66,53.92 52.71,53.96
N$616
  Top 0.8: 52.71,53.96 52.76,54.01
N$617
  Top 0.8: 52.76,54.01 52.81,54.07
N$618
  Top 0.8: 52.81,54.07 52.85,54.13
N$619
  Top 0.8: 52.85,54.13 52.88,54.19
N$620
  Top 0.8: 52.88,54.19 52.91,54.25
N$621
  Top 0.8: 52.91,54.25 52.93,54.32
N$622
  Top 0.8: 52.93,54.32 52.95,54.39
N$623
  Top 0.8: 52.95,54.39 52.97,54.45
N$624
  Top 0.8: 52.97,54.45 52.98,54.52
N$625
  Top 0.8: 52.98,54.52 52.99,54.59
N$626
  Top 0.8: 52.99,54.59 53,54.66
N$627
  Top 0.8: 53,54.66 53,54.73
N$628
  Top 0.8: 53,54.73 53.01,54.8
N$629
  Top 0.8: 53.01,54.8 53,54.87
N$630
  Top 0.8: 53,54.87 53,54.94
N$631
  Top 0.8: 53,54.94 52.99,55.01
N$632
  Top 0.8: 52.99,55.01 52.98,55.08
N$633
  Top 0.8: 52.98,55.08 52.97,55.15
N$634
  Top 0.8: 52.97,55.15 52.96,55.22
N$635
  Top 0.8: 52.96,55.22 52.93,55.29
N$636
  Top 0.8: 52.93,55.29 52.9,55.35
N$637
  Top 0.8: 52.9,55.35 52.86,55.41
N$638
  Top 0.8: 52.86,55.41 52.8,55.45
N$639
  Top 0.8: 52.8,55.45 52.75,55.43
N$640
  Top 0.8: 52.75,55.43 52.73,55.36
N$641
  Top 0.8: 52.73,55.36 52.72,55.29
N$642
  Top 0.8: 52.72,55.29 52.71,55.15
N$643
  Top 0.8: 52.71,55.15 52.71,54.94
N$644
  Top 0.8: 52.71,54.94 52.72,54.38
N$645
  Top 0.8: 52.72,54.38 52.72,54.31
N$646
  Top 0.8: 52.72,54.31 52.7,54.24
N$647
  Top 0.8: 52.7,54.24 52.69,54.17
N$648
  Top 0.8: 52.69,54.17 52.67,54.1
N$649
  Top 0.8: 52.67,54.1 52.65,54.03
N$650
  Top 0.8: 52.65,54.03 52.63,53.97
N$651
  Top 0.8: 52.63,53.97 52.6,53.9
N$652
  Top 0.8: 52.6,53.9 52.57,53.84
N$653
  Top 0.8: 52.57,53.84 52.54,53.78
N$654
  Top 0.8: 52.54,53.78 52.51,53.71
N$655
  Top 0.8: 52.51,53.71 52.47,53.66
N$656
  Top 0.8: 52.47,53.66 52.43,53.6
N$657
  Top 0.8: 52.43,53.6 52.38,53.54
N$658
  Top 0.8: 52.38,53.54 52.34,53.49
N$659
  Top 0.8: 52.34,53.49 52.28,53.44
N$660
  Top 0.8: 52.28,53.44 52.23,53.4
N$661
  Top 0.8: 52.23,53.4 52.18,53.35
N$662
  Top 0.8: 52.18,53.35 52.12,53.31
N$663
  Top 0.8: 52.12,53.31 52.01,53.23
N$664
  Top 0.8: 52.01,53.23 51.95,53.2
N$665
  Top 0.8: 51.95,53.2 51.88,53.16
N$666
  Top 0.8: 51.88,53.16 51.76,53.09
N$667
  Top 0.8: 51.76,53.09 51.57,52.99
N$668
  Top 0.8: 59.35,72.38 59.41,72.35
N$669
  Top 0.8: 59.41,72.35 59.47,72.31
N$670
  Top 0.8: 59.47,72.31 59.53,72.27
N$671
  Top 0.8: 59.53,72.27 59.58,72.23
N$672
  Top 0.8: 59.58,72.23 59.64,72.18
N$673
  Top 0.8: 59.64,72.18 59.69,72.13
N$674
  Top 0.8: 59.69,72.13 59.74,72.08
N$675
  Top 0.8: 59.74,72.08 59.79,72.03
N$676
  Top 0.8: 59.79,72.03 59.83,71.98
N$677
  Top 0.8: 59.83,71.98 59.87,71.92
N$678
  Top 0.8: 59.87,71.92 59.92,71.87
N$679
  Top 0.8: 59.92,71.87 59.96,71.81
N$680
  Top 0.8: 59.96,71.81 59.99,71.75
N$681
  Top 0.8: 59.99,71.75 60.03,71.69
N$682
  Top 0.8: 60.03,71.69 60.06,71.63
N$683
  Top 0.8: 60.06,71.63 60.09,71.56
N$684
  Top 0.8: 60.09,71.56 60.12,71.5
N$685
  Top 0.8: 60.12,71.5 60.14,71.43
N$686
  Top 0.8: 60.14,71.43 60.16,71.37
N$687
  Top 0.8: 60.16,71.37 60.17,71.3
N$688
  Top 0.8: 60.17,71.3 60.18,71.23
N$689
  Top 0.8: 60.18,71.23 60.18,71.16
N$690
  Top 0.8: 60.18,71.16 60.18,71.09
N$691
  Top 0.8: 60.18,71.09 60.17,71.02
N$692
  Top 0.8: 60.17,71.02 60.16,70.95
N$693
  Top 0.8: 60.16,70.95 60.13,70.88
N$694
  Top 0.8: 60.13,70.88 60.1,70.82
N$695
  Top 0.8: 60.1,70.82 60.07,70.76
N$696
  Top 0.8: 60.07,70.76 60.03,70.7
N$697
  Top 0.8: 60.03,70.7 59.98,70.65
N$698
  Top 0.8: 59.98,70.65 59.93,70.6
N$699
  Top 0.8: 59.93,70.6 59.87,70.56
N$700
  Top 0.8: 59.87,70.56 59.82,70.52
N$701
  Top 0.8: 59.82,70.52 59.76,70.48
N$702
  Top 0.8: 59.76,70.48 59.7,70.44
N$703
  Top 0.8: 59.7,70.44 59.58,70.38
N$704
  Top 0.8: 59.58,70.38 59.51,70.35
N$705
  Top 0.8: 59.51,70.35 59.45,70.32
N$706
  Top 0.8: 59.45,70.32 59.32,70.27
N$707
  Top 0.8: 59.32,70.27 59.18,70.22
N$708
  Top 0.8: 59.18,70.22 59.05,70.19
N$709
  Top 0.8: 59.05,70.19 58.91,70.16
N$710
  Top 0.8: 58.91,70.16 58.77,70.14
N$711
  Top 0.8: 58.77,70.14 58.63,70.12
N$712
  Top 0.8: 58.63,70.12 58.49,70.11
N$713
  Top 0.8: 58.49,70.11 58.35,70.1
N$714
  Top 0.8: 58.35,70.1 58.15,70.1
N$715
  Top 0.8: 58.15,70.1 57.87,70.09
N$716
  Top 0.8: 56.09,63.35 56.19,63.24
N$717
  Top 0.8: 56.19,63.24 56.23,63.19
N$718
  Top 0.8: 56.23,63.19 56.32,63.08
N$719
  Top 0.8: 56.32,63.08 56.4,62.96
N$720
  Top 0.8: 56.4,62.96 56.44,62.9
N$721
  Top 0.8: 56.44,62.9 56.5,62.78
N$722
  Top 0.8: 56.5,62.78 56.56,62.65
N$723
  Top 0.8: 56.56,62.65 56.6,62.52
N$724
  Top 0.8: 56.6,62.52 56.63,62.38
N$725
  Top 0.8: 56.63,62.38 56.65,62.24
N$726
  Top 0.8: 56.65,62.24 56.65,62.1
N$727
  Top 0.8: 56.65,62.1 56.64,62.03
N$728
  Top 0.8: 56.64,62.03 56.63,61.96
N$729
  Top 0.8: 56.63,61.96 56.61,61.89
N$730
  Top 0.8: 56.61,61.89 56.57,61.76
N$731
  Top 0.8: 56.57,61.76 56.55,61.69
N$732
  Top 0.8: 56.55,61.69 56.52,61.63
N$733
  Top 0.8: 56.52,61.63 56.48,61.56
N$734
  Top 0.8: 56.48,61.56 56.45,61.51
N$735
  Top 0.8: 56.45,61.51 56.4,61.45
N$736
  Top 0.8: 56.4,61.45 56.36,61.4
N$737
  Top 0.8: 56.36,61.4 56.31,61.34
N$738
  Top 0.8: 56.31,61.34 56.26,61.3
N$739
  Top 0.8: 56.26,61.3 56.21,61.25
N$740
  Top 0.8: 56.21,61.25 56.15,61.21
N$741
  Top 0.8: 56.15,61.21 56.09,61.17
N$742
  Top 0.8: 56.09,61.17 56.03,61.14
N$743
  Top 0.8: 56.03,61.14 55.96,61.11
N$744
  Top 0.8: 55.96,61.11 55.9,61.08
N$745
  Top 0.8: 55.9,61.08 55.83,61.06
N$746
  Top 0.8: 55.83,61.06 55.76,61.04
N$747
  Top 0.8: 55.76,61.04 55.7,61.03
N$748
  Top 0.8: 55.7,61.03 55.63,61.02
N$749
  Top 0.8: 55.63,61.02 55.48,61.01
N$750
  Top 0.8: 55.48,61.01 55.35,61.02
N$751
  Top 0.8: 55.35,61.02 55.21,61.05
N$752
  Top 0.8: 55.21,61.05 55.14,61.07
N$753
  Top 0.8: 55.14,61.07 55.07,61.09
N$754
  Top 0.8: 55.07,61.09 54.94,61.15
N$755
  Top 0.8: 54.94,61.15 54.82,61.21
N$756
  Top 0.8: 54.82,61.21 54.7,61.29
N$757
  Top 0.8: 54.7,61.29 54.59,61.38
N$758
  Top 0.8: 54.59,61.38 54.54,61.42
N$759
  Top 0.8: 54.54,61.42 54.43,61.52
N$760
  Top 0.8: 64.27,63.06 64.53,62.96
N$761
  Top 0.8: 64.53,62.96 64.59,62.92
N$762
  Top 0.8: 64.59,62.92 64.64,62.88
N$763
  Top 0.8: 64.64,62.88 65.41,62.06
N$764
  Top 0.8: 65.41,62.06 65.64,61.8
N$765
  Top 0.8: 65.64,61.8 65.69,61.75
N$766
  Top 0.8: 65.69,61.75 65.71,61.68
N$767
  Top 0.8: 65.71,61.68 65.71,61.61
N$768
  Top 0.8: 65.71,61.61 65.67,61.56
N$769
  Top 0.8: 65.67,61.56 65.62,61.52
N$770
  Top 0.8: 65.62,61.52 65.55,61.48
N$771
  Top 0.8: 65.55,61.48 65.49,61.46
N$772
  Top 0.8: 65.49,61.46 65.42,61.45
N$773
  Top 0.8: 65.42,61.45 65.35,61.43
N$774
  Top 0.8: 65.35,61.43 65.28,61.42
N$775
  Top 0.8: 65.28,61.42 65.21,61.41
N$776
  Top 0.8: 65.21,61.41 65.14,61.41
N$777
  Top 0.8: 65.14,61.41 65,61.39
N$778
  Top 0.8: 65,61.39 64.79,61.39
N$779
  Top 0.8: 64.79,61.39 64.65,61.38
N$780
  Top 0.8: 64.65,61.38 64.3,61.39
N$781
  Top 0.8: 64.3,61.39 63.81,61.4
N$782
  Top 0.8: 62.27,56.77 62.33,56.73
N$783
  Top 0.8: 62.33,56.73 62.38,56.68
N$784
  Top 0.8: 62.38,56.68 62.43,56.64
N$785
  Top 0.8: 62.43,56.64 62.49,56.59
N$786
  Top 0.8: 62.49,56.59 62.58,56.49
N$787
  Top 0.8: 62.58,56.49 62.68,56.38
N$788
  Top 0.8: 62.68,56.38 62.76,56.28
N$789
  Top 0.8: 62.76,56.28 62.89,56.11
N$790
  Top 0.8: 62.89,56.11 62.97,55.99
N$791
  Top 0.8: 62.97,55.99 63.13,55.76
N$792
  Top 0.8: 63.13,55.76 63.24,55.58
N$793
  Top 0.8: 63.24,55.58 63.42,55.27
N$794
  Top 0.8: 63.42,55.27 63.45,55.21
N$795
  Top 0.8: 63.45,55.21 63.46,55.14
N$796
  Top 0.8: 63.46,55.14 63.46,55.07
N$797
  Top 0.8: 63.46,55.07 63.44,55.01
N$798
  Top 0.8: 63.44,55.01 63.4,54.95
N$799
  Top 0.8: 63.4,54.95 63.35,54.9
N$800
  Top 0.8: 63.35,54.9 63.29,54.86
N$801
  Top 0.8: 63.29,54.86 63.23,54.83
N$802
  Top 0.8: 63.23,54.83 63.16,54.8
N$803
  Top 0.8: 63.16,54.8 63.1,54.78
N$804
  Top 0.8: 63.1,54.78 63.03,54.76
N$805
  Top 0.8: 63.03,54.76 62.96,54.75
N$806
  Top 0.8: 62.96,54.75 62.89,54.73
N$807
  Top 0.8: 62.89,54.73 62.75,54.7
N$808
  Top 0.8: 62.75,54.7 62.54,54.68
N$809
  Top 0.8: 62.54,54.68 62.4,54.67
N$810
  Top 0.8: 62.4,54.67 62.19,54.65
N$811
  Top 0.8: 62.19,54.65 61.98,54.65
N$812
  Top 0.8: 61.98,54.65 61.56,54.64
N$813
  Top 0.8: 61.56,54.64 61.07,54.65
N$814
  Top 0.8: 67.36,63 67.41,63.03
N$815
  Top 0.8: 67.41,63.03 67.42,62.97
N$816
  Top 0.8: 67.42,62.97 67.43,62.9
N$817
  Top 0.8: 67.43,62.9 67.44,62.76
N$818
  Top 0.8: 67.44,62.76 67.43,62.55
N$819
  Top 0.8: 67.43,62.55 67.42,62.12
N$820
  Top 0.8: 67.42,62.12 67.42,62.06
N$821
  Top 0.8: 67.42,62.06 67.44,61.64
N$822
  Top 0.8: 67.44,61.64 67.45,61.5
N$823
  Top 0.8: 67.45,61.5 67.45,61.42
N$824
  Top 0.8: 67.45,61.42 67.45,61.36
N$825
  Top 0.8: 67.45,61.36 67.44,61.22
N$826
  Top 0.8: 67.44,61.22 67.42,61.08
N$827
  Top 0.8: 67.42,61.08 67.41,61.01
N$828
  Top 0.8: 67.41,61.01 67.4,60.94
N$829
  Top 0.8: 67.4,60.94 67.36,60.8
N$830
  Top 0.8: 67.36,60.8 67.34,60.73
N$831
  Top 0.8: 67.34,60.73 67.3,60.6
N$832
  Top 0.8: 65.64,54.31 65.64,54.24
N$833
  Top 0.8: 65.64,54.24 65.63,54.17
N$834
  Top 0.8: 65.63,54.17 65.61,54.1
N$835
  Top 0.8: 65.61,54.1 65.59,54.04
N$836
  Top 0.8: 65.59,54.04 65.56,53.97
N$837
  Top 0.8: 65.56,53.97 65.54,53.91
N$838
  Top 0.8: 65.54,53.91 65.48,53.78
N$839
  Top 0.8: 65.48,53.78 65.41,53.66
N$840
  Top 0.8: 65.41,53.66 65.31,53.48
N$841
  Top 0.8: 65.31,53.48 65.23,53.36
N$842
  Top 0.8: 65.23,53.36 65.15,53.24
N$843
  Top 0.8: 65.15,53.24 65.03,53.08
N$844
  Top 0.8: 65.03,53.08 64.94,52.97
N$845
  Top 0.8: 64.94,52.97 64.81,52.8
N$846
  Top 0.8: 64.81,52.8 64.67,52.65
N$847
  Top 0.8: 64.67,52.65 64.57,52.55
N$848
  Top 0.8: 64.57,52.55 64.47,52.45
N$849
  Top 0.8: 64.47,52.45 64.36,52.36
N$850
  Top 0.8: 64.36,52.36 64.31,52.32
N$851
  Top 0.8: 64.31,52.32 64.25,52.28
N$852
  Top 0.8: 64.25,52.28 64.2,52.24
N$853
  Top 0.8: 64.2,52.24 64.14,52.2
N$854
  Top 0.8: 64.14,52.2 64.07,52.17
N$855
  Top 0.8: 64.07,52.17 64.01,52.14
N$856
  Top 0.8: 64.01,52.14 63.94,52.13
N$857
  Top 0.8: 63.94,52.13 63.87,52.11
N$858
  Top 0.8: 63.87,52.11 63.73,52.09
N$859
  Top 0.8: 63.73,52.09 63.66,52.09
N$860
  Top 0.8: 63.66,52.09 63.53,52.08
N$861
  Top 0.8: 63.53,52.08 63.39,52.07
N$862
  Top 0.8: 63.39,52.07 62.9,52.08
N$863
  Top 0.8: 72.28,54.65 72.34,54.68
N$864
  Top 0.8: 72.34,54.68 72.41,54.68
N$865
  Top 0.8: 72.41,54.68 72.48,54.66
N$866
  Top 0.8: 72.48,54.66 72.53,54.61
N$867
  Top 0.8: 72.53,54.61 72.56,54.55
N$868
  Top 0.8: 72.56,54.55 72.59,54.48
N$869
  Top 0.8: 72.59,54.48 72.61,54.41
N$870
  Top 0.8: 72.61,54.41 72.62,54.34
N$871
  Top 0.8: 72.62,54.34 72.63,54.27
N$872
  Top 0.8: 72.63,54.27 72.64,54.2
N$873
  Top 0.8: 72.64,54.2 72.65,54.06
N$874
  Top 0.8: 72.65,54.06 72.65,53.85
N$875
  Top 0.8: 72.65,53.85 72.64,53.71
N$876
  Top 0.8: 72.64,53.71 72.63,53.5
N$877
  Top 0.8: 72.63,53.5 72.61,53.22
N$878
  Top 0.8: 72.61,53.22 72.55,52.73
N$879
  Top 0.8: 72.55,52.73 72.4,51.68
N$880
  Top 0.8: 72.4,51.68 72.39,51.61
N$881
  Top 0.8: 72.39,51.61 72.35,51.4
N$882
  Top 0.8: 72.35,51.4 72.33,51.26
N$883
  Top 0.8: 72.33,51.26 72.28,51.06
N$884
  Top 0.8: 72.28,51.06 72.23,50.85
N$885
  Top 0.8: 72.23,50.85 72.19,50.72
N$886
  Top 0.8: 72.19,50.72 72.13,50.51
N$887
  Top 0.8: 72.13,50.51 72.11,50.45
N$888
  Top 0.8: 72.11,50.45 72.06,50.31
N$889
  Top 0.8: 72.06,50.31 71.99,50.11
N$890
  Top 0.8: 71.99,50.11 71.94,49.98
N$891
  Top 0.8: 71.94,49.98 71.85,49.79
N$892
  Top 0.8: 71.85,49.79 71.76,49.6
N$893
  Top 0.8: 71.76,49.6 71.7,49.47
N$894
  Top 0.8: 71.7,49.47 71.63,49.35
N$895
  Top 0.8: 71.63,49.35 71.59,49.29
N$896
  Top 0.8: 71.59,49.29 71.52,49.17
N$897
  Top 0.8: 71.52,49.17 71.41,48.99
N$898
  Top 0.8: 71.41,48.99 71.33,48.87
N$899
  Top 0.8: 71.33,48.87 71.2,48.7
N$900
  Top 0.8: 71.2,48.7 71.07,48.54
N$901
  Top 0.8: 71.07,48.54 70.98,48.43
N$902
  Top 0.8: 70.98,48.43 70.93,48.38
N$903
  Top 0.8: 70.93,48.38 70.83,48.28
N$904
  Top 0.8: 70.83,48.28 70.73,48.17
N$905
  Top 0.8: 70.73,48.17 70.58,48.03
N$906
  Top 0.8: 70.58,48.03 70.42,47.89
N$907
  Top 0.8: 70.42,47.89 70.31,47.8
N$908
  Top 0.8: 70.31,47.8 70.15,47.67
N$909
  Top 0.8: 70.15,47.67 69.97,47.55
N$910
  Top 0.8: 69.97,47.55 69.79,47.44
N$911
  Top 0.8: 69.79,47.44 69.68,47.36
N$912
  Top 0.8: 69.68,47.36 69.49,47.26
N$913
  Top 0.8: 69.49,47.26 69.3,47.16
N$914
  Top 0.8: 69.25,47.1 69.32,47.1
N$915
  Top 0.8: 69.32,47.1 69.39,47.09
N$916
  Top 0.8: 69.39,47.09 69.46,47.08
N$917
  Top 0.8: 69.46,47.08 69.52,47.07
N$918
  Top 0.8: 69.52,47.07 69.59,47.05
N$919
  Top 0.8: 69.59,47.05 69.66,47.02
N$920
  Top 0.8: 69.66,47.02 69.72,47
N$921
  Top 0.8: 69.72,47 69.79,46.97
N$922
  Top 0.8: 69.79,46.97 70.16,46.78
N$923
  Top 0.8: 70.16,46.78 70.48,46.64
N$924
  Top 0.8: 70.48,46.64 70.67,46.54
N$925
  Top 0.8: 70.67,46.54 70.8,46.48
N$926
  Top 0.8: 70.8,46.48 70.92,46.41
N$927
  Top 0.8: 70.92,46.41 71.1,46.3
N$928
  Top 0.8: 71.1,46.3 71.27,46.18
N$929
  Top 0.8: 71.27,46.18 71.39,46.1
N$930
  Top 0.8: 71.39,46.1 71.44,46.06
N$931
  Top 0.8: 71.44,46.06 71.55,45.97
N$932
  Top 0.8: 71.55,45.97 71.65,45.87
N$933
  Top 0.8: 71.65,45.87 71.75,45.77
N$934
  Top 0.8: 71.75,45.77 71.84,45.67
N$935
  Top 0.8: 71.84,45.67 71.89,45.61
N$936
  Top 0.8: 71.89,45.61 71.98,45.5
N$937
  Top 0.8: 71.98,45.5 72.02,45.44
N$938
  Top 0.8: 72.02,45.44 72.1,45.33
N$939
  Top 0.8: 72.1,45.33 72.13,45.27
N$940
  Top 0.8: 72.13,45.27 72.21,45.15
N$941
  Top 0.8: 72.21,45.15 72.3,44.96
N$942
  Top 0.8: 72.3,44.96 72.36,44.83
N$943
  Top 0.8: 72.36,44.83 72.42,44.71
N$944
  Top 0.8: 72.42,44.71 72.47,44.58
N$945
  Top 0.8: 72.47,44.58 72.52,44.44
N$946
  Top 0.8: 72.52,44.44 72.59,44.24
N$947
  Top 0.8: 72.59,44.24 72.65,44.04
N$948
  Top 0.8: 72.65,44.04 72.7,43.84
N$949
  Top 0.8: 72.7,43.84 72.74,43.7
N$950
  Top 0.8: 72.74,43.7 72.77,43.57
N$951
  Top 0.8: 72.77,43.57 72.79,43.43
N$952
  Top 0.8: 72.79,43.43 72.82,43.29
N$953
  Top 0.8: 72.82,43.29 72.82,43.22
N$954
  Top 0.8: 72.82,43.22 72.83,43.08
N$955
  Top 0.8: 72.83,43.08 72.84,43.01
N$956
  Top 0.8: 72.84,43.01 72.83,42.94
N$957
  Top 0.8: 72.83,42.94 72.83,42.87
N$958
  Top 0.8: 72.83,42.87 72.82,42.8
N$959
  Top 0.8: 72.82,42.8 72.81,42.73
N$960
  Top 0.8: 72.81,42.73 72.8,42.66
N$961
  Top 0.8: 72.8,42.66 72.78,42.59
N$962
  Top 0.8: 72.78,42.59 72.76,42.53
N$963
  Top 0.8: 72.76,42.53 72.73,42.46
N$964
  Top 0.8: 72.73,42.46 72.7,42.4
N$965
  Top 0.8: 72.7,42.4 72.66,42.34
N$966
  Top 0.8: 72.66,42.34 72.62,42.28
N$967
  Top 0.8: 72.62,42.28 72.58,42.22
N$968
  Top 0.8: 72.58,42.22 72.54,42.17
N$969
  Top 0.8: 72.54,42.17 72.49,42.12
N$970
  Top 0.8: 72.49,42.12 72.44,42.08
N$971
  Top 0.8: 72.44,42.08 72.38,42.03
N$972
  Top 0.8: 72.38,42.03 72.32,41.99
N$973
  Top 0.8: 72.32,41.99 72.27,41.95
N$974
  Top 0.8: 72.27,41.95 72.21,41.91
N$975
  Top 0.8: 72.21,41.91 72.14,41.88
N$976
  Top 0.8: 72.14,41.88 72.08,41.85
N$977
  Top 0.8: 72.08,41.85 72.02,41.82
N$978
  Top 0.8: 72.02,41.82 71.95,41.79
N$979
  Top 0.8: 71.95,41.79 71.75,41.72
N$980
  Top 0.8: 71.75,41.72 71.69,41.7
N$981
  Top 0.8: 71.69,41.7 71.48,41.64
N$982
  Top 0.8: 71.48,41.64 71.28,41.61
N$983
  Top 0.8: 71.28,41.61 71.21,41.6
N$984
  Top 0.8: 71.21,41.6 71.07,41.59
N$985
  Top 0.8: 71.07,41.59 71,41.59
N$986
  Top 0.8: 71,41.59 70.86,41.59
N$987
  Top 0.8: 70.86,41.59 70.79,41.59
N$988
  Top 0.8: 70.79,41.59 70.65,41.61
N$989
  Top 0.8: 70.65,41.61 70.58,41.62
N$990
  Top 0.8: 70.58,41.62 70.44,41.65
N$991
  Top 0.8: 70.44,41.65 70.24,41.7
N$992
  Top 0.8: 70.24,41.7 70.04,41.77
N$993
  Top 0.8: 70.04,41.77 69.84,41.85
N$994
  Top 0.8: 69.84,41.85 69.66,41.94
N$995
  Top 0.8: 69.66,41.94 69.53,42.01
N$996
  Top 0.8: 69.53,42.01 69.47,42.05
N$997
  Top 0.8: 69.47,42.05 69.29,42.16
N$998
  Top 0.8: 69.29,42.16 69.12,42.27
N$999
  Top 0.8: 69.12,42.27 68.94,42.39
N$1000
  Top 0.8: 67.98,43.1 67.75,43.26
N$1001
  Top 0.8: 67.75,43.26 67.57,43.37
N$1002
  Top 0.8: 67.57,43.37 67.46,43.45
N$1003
  Top 0.8: 67.46,43.45 67.4,43.48
N$1004
  Top 0.8: 67.4,43.48 67.21,43.59
N$1005
  Top 0.8: 67.21,43.59 67.02,43.68
N$1006
  Top 0.8: 67.02,43.68 66.89,43.74
N$1007
  Top 0.8: 66.89,43.74 66.83,43.76
N$1008
  Top 0.8: 66.83,43.76 66.7,43.81
N$1009
  Top 0.8: 66.7,43.81 66.63,43.83
N$1010
  Top 0.8: 66.63,43.83 66.5,43.87
N$1011
  Top 0.8: 66.5,43.87 66.29,43.92
N$1012
  Top 0.8: 66.29,43.92 66.22,43.93
N$1013
  Top 0.8: 66.22,43.93 66.08,43.95
N$1014
  Top 0.8: 66.08,43.95 65.87,43.96
N$1015
  Top 0.8: 68.85,44.93 68.86,44.92
N$1016
  Top 0.8: 68.86,44.92 69.16,44.75
N$1017
  Top 0.8: 69.16,44.75 69.34,44.64
N$1018
  Top 0.8: 69.34,44.64 69.41,44.6
N$1019
  Top 0.8: 69.41,44.6 69.52,44.53
N$1020
  Top 0.8: 69.52,44.53 69.58,44.49
N$1021
  Top 0.8: 69.58,44.49 69.7,44.4
N$1022
  Top 0.8: 69.7,44.4 69.75,44.36
N$1023
  Top 0.8: 69.75,44.36 69.8,44.31
N$1024
  Top 0.8: 69.8,44.31 69.85,44.26
N$1025
  Top 0.8: 69.85,44.26 69.9,44.21
N$1026
  Top 0.8: 69.9,44.21 69.94,44.15
N$1027
  Top 0.8: 69.94,44.15 69.98,44.09
N$1028
  Top 0.8: 69.98,44.09 70.02,44.04
N$1029
  Top 0.8: 70.02,44.04 70.05,43.97
N$1030
  Top 0.8: 70.05,43.97 70.11,43.85
N$1031
  Top 0.8: 70.11,43.85 70.17,43.72
N$1032
  Top 0.8: 70.17,43.72 70.22,43.59
N$1033
  Top 0.8: 70.22,43.59 70.26,43.45
N$1034
  Top 0.8: 70.26,43.45 70.32,43.25
N$1035
  Top 0.8: 70.32,43.25 70.34,43.11
N$1036
  Top 0.8: 70.34,43.11 70.37,42.97
N$1037
  Top 0.8: 70.37,42.97 70.39,42.83
N$1038
  Top 0.8: 70.39,42.83 70.4,42.69
N$1039
  Top 0.8: 70.4,42.69 70.41,42.55
N$1040
  Top 0.8: 70.41,42.55 70.41,42.41
N$1041
  Top 0.8: 70.41,42.41 70.41,42.27
N$1042
  Top 0.8: 70.41,42.27 70.4,42.2
N$1043
  Top 0.8: 70.4,42.2 70.39,42.13
N$1044
  Top 0.8: 70.39,42.13 70.38,42.06
N$1045
  Top 0.8: 70.38,42.06 70.37,41.99
N$1046
  Top 0.8: 70.37,41.99 70.35,41.92
N$1047
  Top 0.8: 70.35,41.92 70.33,41.86
N$1048
  Top 0.8: 70.33,41.86 70.31,41.79
N$1049
  Top 0.8: 70.31,41.79 70.28,41.73
N$1050
  Top 0.8: 46.71,55.68 46.74,55.75
N$1051
  Top 0.8: 46.74,55.75 46.69,55.7
N$1052
  Top 0.8: 46.69,55.7 46.64,55.65
N$1053
  Top 0.8: 46.64,55.65 46.52,55.48
N$1054
  Top 0.8: 46.52,55.48 46.4,55.31
N$1055
  Top 0.8: 46.4,55.31 46.28,55.13
N$1056
  Top 0.8: 46.28,55.13 46.24,55.07
N$1057
  Top 0.8: 46.24,55.07 46.17,54.95
N$1058
  Top 0.8: 46.17,54.95 46.14,54.89
N$1059
  Top 0.8: 46.14,54.89 46.12,54.82
N$1060
  Top 0.8: 46.12,54.82 46.1,54.75
N$1061
  Top 0.8: 46.1,54.75 46.09,54.69
N$1062
  Top 0.8: 46.09,54.69 46.06,54.55
N$1063
  Top 0.8: 46.06,54.55 46.05,54.48
N$1064
  Top 0.8: 46.05,54.48 46.04,54.34
N$1065
  Top 0.8: 46.04,54.34 46.03,54.27
N$1066
  Top 0.8: 46.03,54.27 46.03,54.13
N$1067
  Top 0.8: 46.03,54.13 46.03,52.44
N$1068
  Top 0.8: 46.03,52.44 46.03,52.37
N$1069
  Top 0.8: 46.03,52.37 46.04,51.81
N$1070
  Top 0.8: 46.04,51.81 46.06,51.53
N$1071
  Top 0.8: 46.06,51.53 46.08,51.25
N$1072
  Top 0.8: 46.08,51.25 46.1,50.97
N$1073
  Top 0.8: 46.1,50.97 46.14,50.69
N$1074
  Top 0.8: 46.14,50.69 46.18,50.42
N$1075
  Top 0.8: 46.18,50.42 46.21,50.28
N$1076
  Top 0.8: 46.21,50.28 46.23,50.14
N$1077
  Top 0.8: 46.23,50.14 46.28,49.93
N$1078
  Top 0.8: 46.28,49.93 46.31,49.8
N$1079
  Top 0.8: 46.31,49.8 46.35,49.66
N$1080
  Top 0.8: 46.35,49.66 46.39,49.53
N$1081
  Top 0.8: 46.39,49.53 46.43,49.39
N$1082
  Top 0.8: 46.43,49.39 46.5,49.19
N$1083
  Top 0.8: 46.5,49.19 46.55,49.06
N$1084
  Top 0.8: 46.55,49.06 46.6,48.93
N$1085
  Top 0.8: 46.6,48.93 46.71,48.67
N$1086
  Top 0.8: 46.71,48.67 46.82,48.42
N$1087
  Top 0.8: 46.82,48.42 46.95,48.17
N$1088
  Top 0.8: 46.95,48.17 46.98,48.1
N$1089
  Top 0.8: 46.98,48.1 47.08,47.92
N$1090
  Top 0.8: 47.08,47.92 47.22,47.67
N$1091
  Top 0.8: 47.22,47.67 47.41,47.38
N$1092
  Top 0.8: 47.41,47.38 47.56,47.14
N$1093
  Top 0.8: 47.56,47.14 47.72,46.91
N$1094
  Top 0.8: 47.72,46.91 47.89,46.69
N$1095
  Top 0.8: 47.89,46.69 48.06,46.46
N$1096
  Top 0.8: 48.06,46.46 48.28,46.19
N$1097
  Top 0.8: 48.28,46.19 48.42,46.03
N$1098
  Top 0.8: 48.42,46.03 48.6,45.82
N$1099
  Top 0.8: 48.6,45.82 48.84,45.56
N$1100
  Top 0.8: 48.84,45.56 49.23,45.16
N$1101
  Top 0.8: 49.23,45.16 49.28,45.11
N$1102
  Top 0.8: 49.28,45.11 49.38,45.01
N$1103
  Top 0.8: 49.38,45.01 49.49,44.92
N$1104
  Top 0.8: 49.49,44.92 49.6,44.83
N$1105
  Top 0.8: 49.6,44.83 49.65,44.79
N$1106
  Top 0.8: 49.65,44.79 49.77,44.71
N$1107
  Top 0.8: 49.77,44.71 49.89,44.63
N$1108
  Top 0.8: 49.89,44.63 50.01,44.56
N$1109
  Top 0.8: 50.01,44.56 50.13,44.5
N$1110
  Top 0.8: 50.13,44.5 50.2,44.47
N$1111
  Top 0.8: 50.2,44.47 50.32,44.41
N$1112
  Top 0.8: 50.32,44.41 50.85,44.2
N$1113
  Top 0.8: 50.85,44.2 50.91,44.18
N$1114
  Top 0.8: 50.91,44.18 50.98,44.16
N$1115
  Top 0.8: 50.98,44.16 50.98,44.12
N$1116
  Top 0.8: 50.98,44.12 50.91,44.11
N$1117
  Top 0.8: 50.91,44.11 50.77,44.13
N$1118
  Top 0.8: 46.2,55.68 46.07,55.62
N$1119
  Top 0.8: 46.07,55.62 45.89,55.52
N$1120
  Top 0.8: 45.89,55.52 45.7,55.41
N$1121
  Top 0.8: 45.7,55.41 44.69,54.78
N$1122
  Top 0.8: 44.69,54.78 44.51,54.67
N$1123
  Top 0.8: 44.51,54.67 44.32,54.57
N$1124
  Top 0.8: 44.32,54.57 44.2,54.51
N$1125
  Top 0.8: 44.2,54.51 44.07,54.45
N$1126
  Top 0.8: 44.07,54.45 43.88,54.36
N$1127
  Top 0.8: 43.88,54.36 43.75,54.3
N$1128
  Top 0.8: 43.75,54.3 43.62,54.26
N$1129
  Top 0.8: 43.62,54.26 43.55,54.23
N$1130
  Top 0.8: 43.55,54.23 43.42,54.19
N$1131
  Top 0.8: 43.42,54.19 43.35,54.17
N$1132
  Top 0.8: 43.35,54.17 43.21,54.14
N$1133
  Top 0.8: 43.21,54.14 43.07,54.11
N$1134
  Top 0.8: 43.07,54.11 43.01,54.1
N$1135
  Top 0.8: 43.01,54.1 42.94,54.09
N$1136